# Altium PCB VRAM SIMM TC524258BJ v1.0_PCB_Altium.pcbdoc
Units mm, origin at the board's own origin, x right, y up, seen from the top; angles counter-clockwise.
Board outline 128.52 x 47.24 mm, 2 copper layers (Top Layer, Bottom Layer); 10 components, 59 nets, 328 pads, 94 vias.
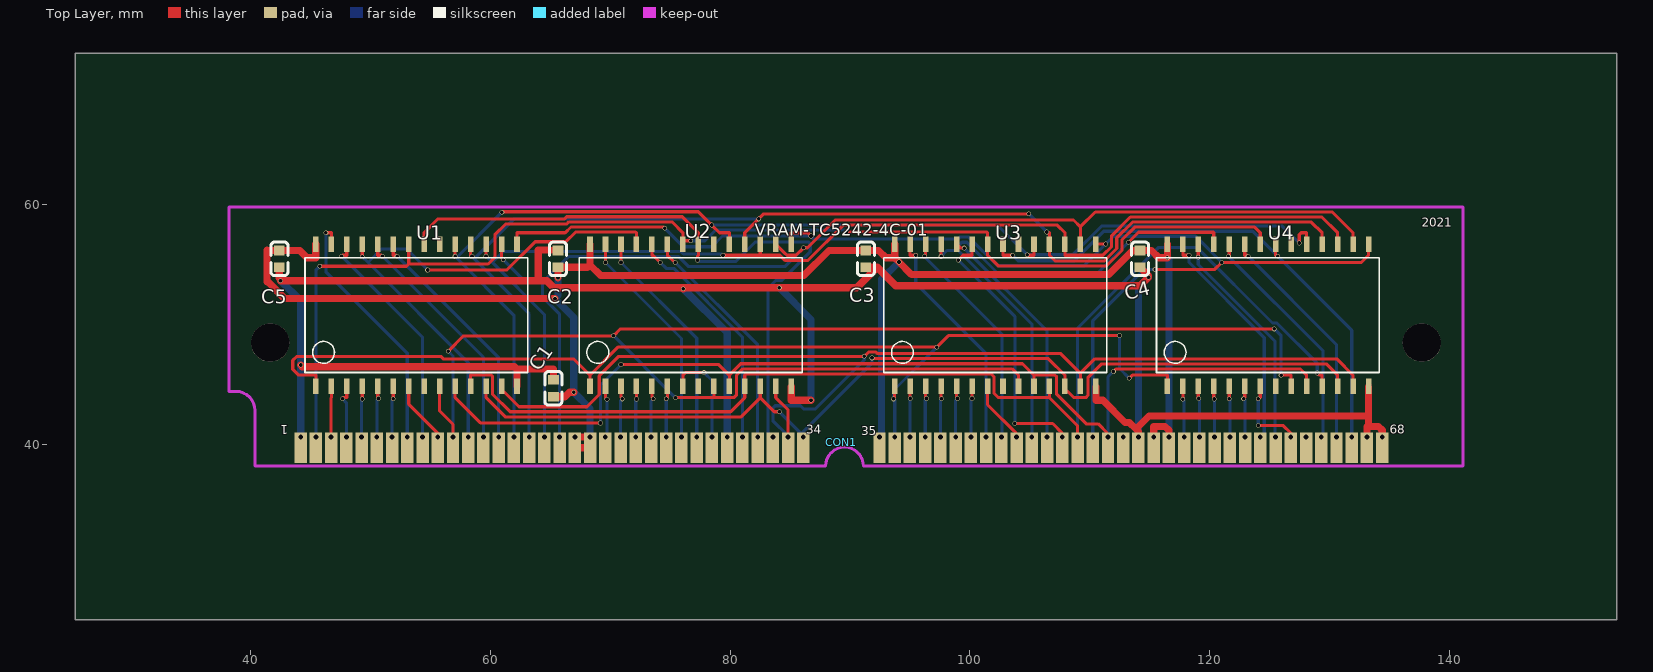
[diagram p0: Top Layer view]
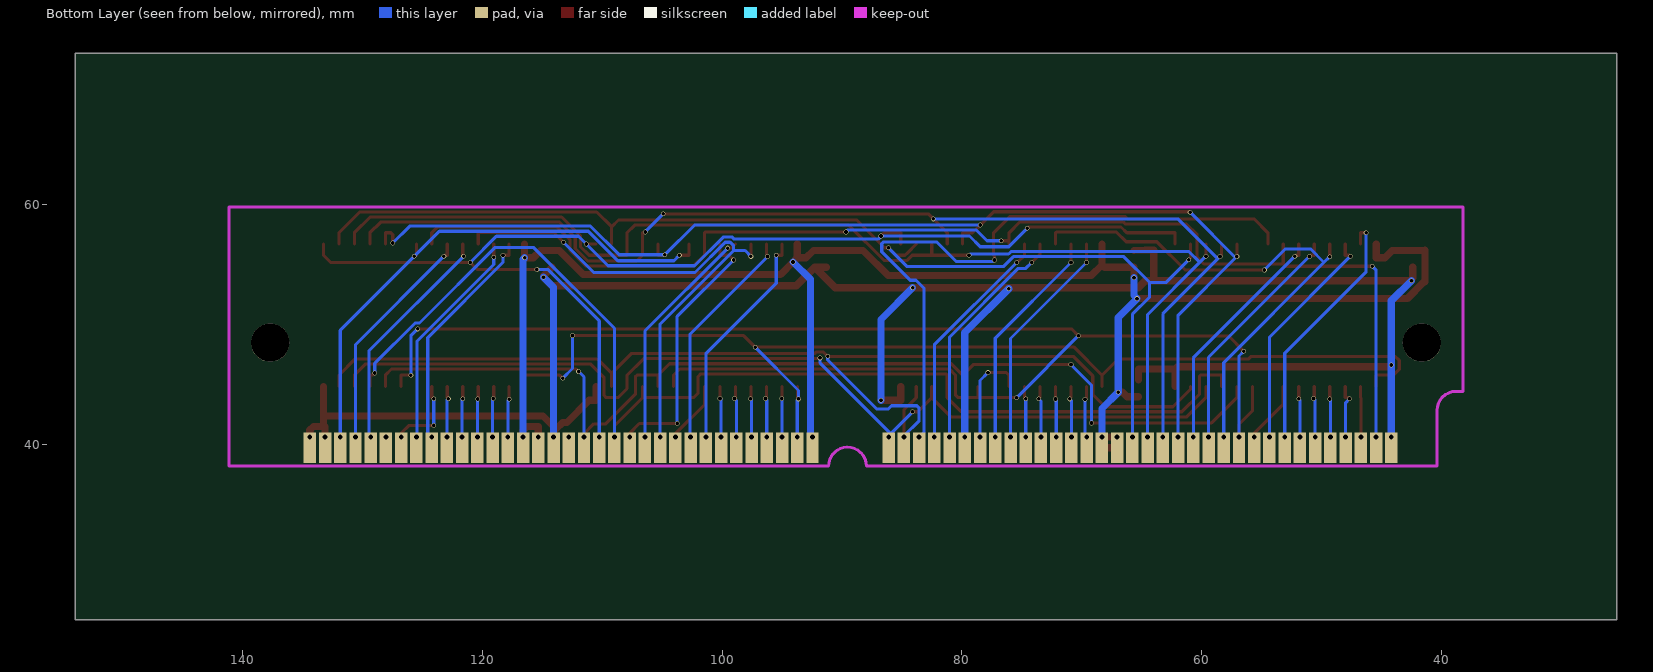
[diagram p1: Bottom Layer view, seen from below]

## Layer stack, top to bottom
Top Layer: signal copper (thickness not stored)
Dielectric: dielectric 0.32, FR-4, Dk 4.8
Bottom Layer: signal copper (thickness not stored)

## Board outline
153.924,25.4 25.4,25.4 25.4,72.644 153.924,72.644

## Components (designator, comment, footprint, x,y, rotation, side; value= is the part's Value field where it differs from the comment)
C1 "1uF" C0603 65.278,44.704 r90 top
C2 "1uF" C0603 65.659,55.499 r90 top
C3 "1uF" C0603 91.313,55.499 r270 top
C4 "1uF" C0603 114.173,55.499 r270 top
C5 "1uF" C0603 42.418,55.499 r270 top
CON1 "SIMM68" SIMM68R 43.688,38.481 r0 top
U1 "TC524258BJ" SOJ28_WIDE 53.848,50.8 r0 top
U2 "TC524258BJ" SOJ28_WIDE 76.708,50.8 r0 top
U3 "TC524258BJ" SOJ28_WIDE 102.108,50.8 r0 top
U4 "TC524258BJ" SOJ28_WIDE 124.841,50.8 r0 top

## Footprints (in the part's own frame and the unit in brackets; to place one, negate y for a bottom-side part, rotate by r counter-clockwise, add the part's x,y. Pads: shape width x height; smd on the part's side, far side on the other; paste and mask are expansions set on the pad)
C0603 [mm]
  rect 0.8x0.9 smd: 1(-0.7,0) 2(0.7,0)
  silkscreen extent -1.4,-0.7 1.4,0.72
SIMM68R [mm]
  rect 1.04x2.54 smd: 1(0.508,1.27) 2(1.778,1.27) 3(3.048,1.27) 4(4.318,1.27) 5(5.588,1.27) 6(6.858,1.27) 7(8.128,1.27) 8(9.398,1.27) 9(10.668,1.27) 10(11.938,1.27) 11(13.208,1.27) 12(14.478,1.27) 13(15.748,1.27) 14(17.018,1.27) 15(18.288,1.27) 16(19.558,1.27) 17(20.828,1.27) 18(22.098,1.27) 19(23.368,1.27) 20(24.638,1.27) 21(25.908,1.27) 22(27.178,1.27) 23(28.448,1.27) 24(29.718,1.27) 25(30.988,1.27) 26(32.258,1.27) 27(33.528,1.27) 28(34.798,1.27) 29(36.068,1.27) 30(37.338,1.27) 31(38.608,1.27) 32(39.878,1.27) 33(41.148,1.27) 34(42.418,1.27) 35(48.768,1.27) 36(50.038,1.27) 37(51.308,1.27) 38(52.578,1.27) 39(53.848,1.27) 40(55.118,1.27) 41(56.388,1.27) 42(57.658,1.27) 43(58.928,1.27) 44(60.198,1.27) 45(61.468,1.27) 46(62.738,1.27) 47(64.008,1.27) 48(65.278,1.27) 49(66.548,1.27) 50(67.818,1.27) 51(69.088,1.27) 52(70.358,1.27) 53(71.628,1.27) 54(72.898,1.27) 55(74.168,1.27) 56(75.438,1.27) 57(76.708,1.27) 58(77.978,1.27) 59(79.248,1.27) 60(80.518,1.27) 61(81.788,1.27) 62(83.058,1.27) 63(84.328,1.27) 64(85.598,1.27) 65(86.868,1.27) 66(88.138,1.27) 67(89.408,1.27) 68(90.678,1.27)
  rect 1.04x2.54 smd far side: 1(0.508,1.27) 2(1.778,1.27) 3(3.048,1.27) 4(4.318,1.27) 5(5.588,1.27) 6(6.858,1.27) 7(8.128,1.27) 8(9.398,1.27) 9(10.668,1.27) 10(11.938,1.27) 11(13.208,1.27) 12(14.478,1.27) 13(15.748,1.27) 14(17.018,1.27) 15(18.288,1.27) 16(19.558,1.27) 17(20.828,1.27) 18(22.098,1.27) 19(23.368,1.27) 20(24.638,1.27) 21(25.908,1.27) 22(27.178,1.27) 23(28.448,1.27) 24(29.718,1.27) 25(30.988,1.27) 26(32.258,1.27) 27(33.528,1.27) 28(34.798,1.27) 29(36.068,1.27) 30(37.338,1.27) 31(38.608,1.27) 32(39.878,1.27) 33(41.148,1.27) 34(42.418,1.27) 35(48.768,1.27) 36(50.038,1.27) 37(51.308,1.27) 38(52.578,1.27) 39(53.848,1.27) 40(55.118,1.27) 41(56.388,1.27) 42(57.658,1.27) 43(58.928,1.27) 44(60.198,1.27) 45(61.468,1.27) 46(62.738,1.27) 47(64.008,1.27) 48(65.278,1.27) 49(66.548,1.27) 50(67.818,1.27) 51(69.088,1.27) 52(70.358,1.27) 53(71.628,1.27) 54(72.898,1.27) 55(74.168,1.27) 56(75.438,1.27) 57(76.708,1.27) 58(77.978,1.27) 59(79.248,1.27) 60(80.518,1.27) 61(81.788,1.27) 62(83.058,1.27) 63(84.328,1.27) 64(85.598,1.27) 65(86.868,1.27) 66(88.138,1.27) 67(89.408,1.27) 68(90.678,1.27)
  round 0.5 hole 0.4: 1(0.508,2.159) 2(1.778,2.159) 3(3.048,2.159) 4(4.318,2.159) 5(5.588,2.159) 6(6.858,2.159) 7(8.128,2.159) 8(9.398,2.159) 9(10.668,2.159) 10(11.938,2.159) 11(13.208,2.159) 12(14.478,2.159) 13(15.748,2.159) 14(17.018,2.159) 15(18.288,2.159) 16(19.558,2.159) 17(20.828,2.159) 18(22.098,2.159) 19(23.368,2.159) 20(24.638,2.159) 21(25.908,2.159) 22(27.178,2.159) 23(28.448,2.159) 24(29.718,2.159) 25(30.988,2.159) 26(32.258,2.159) 27(33.528,2.159) 28(34.798,2.159) 29(36.068,2.159) 30(37.338,2.159) 31(38.608,2.159) 32(39.878,2.159) 33(41.148,2.159) 34(42.418,2.159) 35(48.768,2.159) 36(50.038,2.159) 37(51.308,2.159) 38(52.578,2.159) 39(53.848,2.159) 40(55.118,2.159) 41(56.388,2.159) 42(57.658,2.159) 43(58.928,2.159) 44(60.198,2.159) 45(61.468,2.159) 46(62.738,2.159) 47(64.008,2.159) 48(65.278,2.159) 49(66.548,2.159) 50(67.818,2.159) 51(69.088,2.159) 52(70.358,2.159) 53(71.628,2.159) 54(72.898,2.159) 55(74.168,2.159) 56(75.438,2.159) 57(76.708,2.159) 58(77.978,2.159) 59(79.248,2.159) 60(80.518,2.159) 61(81.788,2.159) 62(83.058,2.159) 63(84.328,2.159) 64(85.598,2.159) 65(86.868,2.159) 66(88.138,2.159) 67(89.408,2.159) 68(90.678,2.159)
SOJ28_WIDE [mil]
  rect 18.3x50.8 smd: 1(-330.2,-233.7) 2(-279.4,-233.7) 3(-228.6,-233.7) 4(-177.8,-233.7) 5(-127,-233.7) 6(-76.2,-233.7) 7(-25.4,-233.7) 8(25.4,-233.7) 9(76.2,-233.7) 10(127,-233.7) 11(177.8,-233.7) 12(228.6,-233.7) 13(279.4,-233.7) 14(330.2,-233.7) 15(330.2,233.7) 16(279.4,233.7) 17(228.6,233.7) 18(177.8,233.7) 19(127,233.7) 20(76.2,233.7) 21(25.4,233.7) 22(-25.4,233.7) 23(-76.2,233.7) 24(-127,233.7) 25(-177.8,233.7) 26(-228.6,233.7) 27(-279.4,233.7) 28(-330.2,233.7)
  silkscreen extent -366,-188 366,188

## Free pads (board coordinates)
  round 3.18 hole 3.18 unplated: ""(41.656,48.514) ""(137.668,48.514)

## Via types
v1: diameter 0.4, hole 0.31, Top Layer to Bottom Layer, 94 vias

## Nets (pads, with @x,y where several pads share a name; then routed paths per layer and width w, separated by ;. In a path a pad name is that pad's centre, name@x,y a point inside that pad or via, vN(x,y) a via of type N, cw(c..) or ccw(c..) an arc to the next point about the centre after c; other vN are vias at no path point)
/CAS_A: CON1.32 U1.21 U2.21 | length 57.2
  Top Layer w0.26: U1.21 54.493,57.673 55.651,58.831 66.208,58.831 66.383,59.007 76.02,59.007 77.353,57.673 U2.21 77.353,56.266 77.353,55.799 77.282,55.725 v1(77.282,55.41) ; CON1.32@83.566,39.751 CON1.32@83.566,40.64
  Bottom Layer w0.26: v1(77.282,55.41) 77.414,55.278 80.48,55.278 82.118,56.916 86.52,56.916 86.683,56.756 86.683,56.091 84.313,53.718 83.83,53.718 83.144,53.033 83.144,41.062 83.566,40.64 CON1.32@83.566,39.751
/CAS_B: CON1.66 U3.21 U4.21 | length 46.5
  Top Layer w0.26: U3.21 102.753,55.799 v1(103.556,55.799) ; U4.21 125.486,56.266 125.486,55.799 125.565,55.799 v1(125.654,55.712) ; CON1.66@131.826,39.751 CON1.66@131.826,40.64
  Bottom Layer w0.26: v1(103.556,55.799) 104.008,55.344 108.687,55.344 111.145,57.803 123.561,57.803 v1(125.654,55.712) 131.826,49.538 131.826,40.64 CON1.66@131.826,39.751
/DT/OE_1: CON1.5 U1.4 | length 6
  Top Layer w0.26: CON1.5@49.276,39.751 CON1.5@49.276,40.64 ; v1(49.332,43.81) U1.4
  Bottom Layer w0.26: CON1.5@49.276,39.751 49.276,40.64 49.276,43.754 v1(49.332,43.81)
/DT/OE_2: CON1.23 U2.4 | length 6
  Top Layer w0.26: CON1.23@72.136,39.751 CON1.23@72.136,40.64 ; v1(72.192,43.812) U2.4
  Bottom Layer w0.26: CON1.23@72.136,39.751 72.136,40.64 72.136,43.757 v1(72.192,43.812)
/DT/OE_3: CON1.39 U3.4 | length 6.1
  Top Layer w0.26: CON1.39@97.536,39.751 CON1.39@97.536,40.64 ; U3.4 97.592,43.884 v1(97.633,43.84)
  Bottom Layer w0.26: CON1.39@97.536,39.751 97.536,40.64 97.536,43.744 v1(97.633,43.84)
/DT/OE_4: CON1.57 U4.4 | length 6
  Top Layer w0.26: U4.4 120.325,43.863 v1(120.363,43.823) ; CON1.57@120.396,39.751 CON1.57@120.396,40.64
  Bottom Layer w0.26: v1(120.363,43.823) 120.396,43.792 120.396,40.64 CON1.57@120.396,39.751
/RAS: CON1.11 U1.9 U2.9 U3.9 U4.9 | length 129.3
  Top Layer w0.26: U1.9 55.783,42.814 56.896,41.702 56.896,40.64 CON1.11@56.896,39.751 ; v1(56.495,47.803) 57.777,49.083 v1(70.284,49.083) 70.863,49.662 v1(125.374,49.662) ; v1(75.441,43.927) 78.643,43.927 ; U2.9 78.643,43.927 ; U3.9 104.043,45.801 103.513,46.332 81.064,46.332 80.548,45.819 80.548,44.158 80.317,43.927 78.643,43.927 ; v1(125.941,45.801) 126.776,45.801 U4.9
  Bottom Layer w0.26: v1(56.495,47.803) 56.896,47.401 56.896,40.64 CON1.11@56.896,39.751 ; v1(70.284,49.083) v1(75.441,43.927) ; v1(125.374,49.662) 125.941,49.096 v1(125.941,45.801)
/SE_A: CON1.12 U1.25 U2.25 | length 47.4
  Top Layer w0.26: v1(49.332,55.677) U1.25 ; v1(54.78,54.567) 61.392,54.567 63.754,56.929 66.309,56.929 67.12,57.739 72.126,57.739 72.192,57.673 U2.25 ; CON1.12@58.166,39.751 CON1.12@58.166,40.64
  Bottom Layer w0.26: v1(49.332,55.677) 49.807,55.202 ; v1(54.78,54.567) 53.017,56.332 50.935,56.332 49.807,55.202 ; CON1.12@58.166,39.751 58.166,40.64 58.166,46.843 49.807,55.202
/SE_B: CON1.45 U3.25 U4.25 | length 47.7
  Top Layer w0.26: v1(97.592,55.707) U3.25 ; CON1.45@105.156,39.751 CON1.45@105.156,40.64 ; v1(113.215,56.888) 114.046,57.719 120.279,57.719 120.325,57.673 U4.25
  Bottom Layer w0.26: v1(97.592,55.707) 98.074,56.19 99.035,56.19 ; CON1.45@105.156,39.751 105.156,40.64 105.156,50.068 99.035,56.19 ; v1(113.215,56.888) 110.693,54.364 102.253,54.364 99.733,56.886 99.324,56.886 99.035,56.596 99.035,56.19
/WB/WE_1: CON1.10 U1.7 | length 7
  Top Layer w0.26: U1.7 53.203,43.386 55.626,40.963 55.626,40.64 CON1.10@55.626,39.751
  Bottom Layer w0.26: CON1.10@55.626,39.751 CON1.10@55.626,40.64
/WB/WE_2: CON1.28 U2.7 | length 10.2
  Top Layer w0.26: U2.7 76.063,45.801 76.276,46.015 v1(77.831,46.015) ; CON1.28@78.486,39.751 CON1.28@78.486,40.64
  Bottom Layer w0.26: v1(77.831,46.015) 78.486,45.359 78.486,40.64 CON1.28@78.486,39.751
/WB/WE_3: CON1.44 U3.7 | length 7
  Top Layer w0.26: U3.7 101.463,43.348 103.886,40.924 103.886,40.64 CON1.44@103.886,39.751
  Bottom Layer w0.26: CON1.44@103.886,39.751 CON1.44@103.886,40.64
/WB/WE_4: CON1.62 U4.7 | length 8.5
  Top Layer w0.26: v1(124.036,41.598) 126.124,41.598 126.746,40.978 126.746,40.64 CON1.62@126.746,39.751 ; v1(124.036,43.838) 124.125,43.927 124.196,43.927 U4.7
  Bottom Layer w0.26: v1(124.036,41.598) v1(124.036,43.838) ; CON1.62@126.746,39.751 CON1.62@126.746,40.64
A0: CON1.15 U1.19 U2.19 U3.19 U4.19 | length 101.3
  Top Layer w0.26: v1(57.074,55.702) U1.19 ; v1(60.973,59.378) 61.026,59.431 77.356,59.431 v1(78.473,58.313) 79.113,57.673 79.934,57.673 U2.19 ; CON1.15@61.976,39.751 CON1.15@61.976,40.64 ; v1(104.765,55.837) 104.803,55.799 105.334,55.799 U3.19 ; v1(127.452,56.825) 127.452,57.511 127.615,57.673 128.067,57.673 U4.19
  Bottom Layer w0.26: v1(57.074,55.702) v1@57.186,55.59 ; v1(60.973,59.378) v1@57.186,55.59 ; CON1.15@61.976,39.751 61.976,40.64 61.976,50.8 v1@57.186,55.59 ; v1(78.473,58.313) 102.288,58.313 v1(104.765,55.837) 108.575,55.837 110.965,58.227 126.047,58.227 v1(127.452,56.825)
A1: CON1.16 U1.18 U2.18 U3.18 U4.18 | length 100.6
  Top Layer w0.26: U1.18 58.364,55.799 v1(58.476,55.687) ; CON1.16@63.246,39.751 CON1.16@63.246,40.64 ; U2.18 81.224,57.673 v1(82.385,58.834) 82.804,59.253 v1(104.897,59.253) ; v1(106.403,57.747) 106.477,57.673 106.624,57.673 U3.18 106.624,56.327 106.624,55.799 107.089,55.334 111.209,55.334 112.235,56.36 112.235,57.252 113.548,58.565 128.466,58.565 129.357,57.673 U4.18
  Bottom Layer w0.26: v1(58.476,55.687) 58.664,55.499 ; CON1.16@63.246,39.751 63.246,40.64 63.246,50.917 58.664,55.499 ; v1(82.385,58.834) 61.999,58.834 58.664,55.499 ; v1(104.897,59.253) v1(106.403,57.747)
A2: CON1.17 U1.17 U2.17 U3.17 U4.17 | length 98.7
  Top Layer w0.26: v1(59.654,55.72) U1.17 ; CON1.17@64.516,39.751 CON1.17@64.516,40.64 ; v1(79.408,55.799) 82.514,55.799 ; U2.17 82.514,55.799 ; U4.17 130.647,57.673 129.334,58.986 113.373,58.986 111.808,57.422 111.808,56.53 111.074,55.799 107.914,55.799 U3.17 107.914,57.203 107.914,57.673 107.274,58.313 89.428,58.313 86.49,55.375 84.567,55.375 84.143,55.799 82.514,55.799
  Bottom Layer w0.26: v1(59.654,55.72) 60.175,55.202 ; CON1.17@64.516,39.751 64.516,40.64 64.516,50.858 60.175,55.202 ; v1(79.408,55.799) 79.306,55.903 76.101,55.903 75.888,56.114 61.087,56.114 60.175,55.202
A3: CON1.18 U1.16 U2.16 U3.16 U4.16 | length 97.9
  Top Layer w0.26: U1.16 60.945,55.565 v1(61.09,55.42) ; CON1.18@65.786,39.751 CON1.18@65.786,40.64 ; U2.16 84.569,55.971 84.569,55.969 84.742,55.799 85.499,55.799 v1(86.126,56.424) 86.457,56.424 88.77,58.737 108.631,58.737 109.205,58.163 ; U3.16 109.205,57.673 109.205,58.163 ; U4.16 131.938,57.673 130.2,59.411 110.452,59.411 109.205,58.163
  Bottom Layer w0.26: v1(61.09,55.42) 62.967,53.543 64.356,53.543 ; CON1.18@65.786,39.751 65.786,40.64 65.786,50.871 64.356,52.301 64.356,53.543 ; v1(86.126,56.424) 84.557,54.854 76.548,54.854 75.712,55.689 66.502,55.689 64.356,53.543
A4: CON1.33 U1.13 U2.13 U3.13 U4.13 | length 97.6
  Top Layer w0.26: U1.13 60.945,44.633 62.405,43.17 68.067,43.17 69.086,44.191 69.086,45.74 70.716,47.371 v1(91.186,47.371) 91.554,47.739 92.136,47.739 92.276,47.602 107.561,47.602 109.205,45.959 ; U2.13 83.805,43.927 84.836,42.896 84.836,40.64 CON1.33@84.836,39.751 ; U3.13 109.205,45.801 109.205,45.959 ; U4.13 131.938,45.801 130.574,47.165 110.411,47.165 109.205,45.959
  Bottom Layer w0.26: CON1.33@84.836,39.751 84.836,40.64 84.836,40.731 83.566,42.001 83.566,43.048 83.767,43.249 85.87,43.249 86.134,42.987 87.109,42.987 91.186,47.064 v1(91.186,47.371)
A5: CON1.34 U1.12 U2.12 U3.12 U4.12 | length 85.8
  Top Layer w0.26: U1.12 59.654,43.927 61.255,42.324 80.914,42.324 82.514,43.927 ; U2.12 82.514,44.394 82.514,43.927 ; v1(84.11,42.756) 83.685,42.756 82.514,43.927 ; CON1.34@86.106,39.751 CON1.34@86.106,40.64 ; v1(91.821,47.244) 91.887,47.178 106.538,47.178 107.914,45.801 107.914,45.227 U3.12 107.914,44.679 108.666,43.927 109.654,43.927 109.83,44.102 109.83,45.585 110.988,46.744 129.705,46.744 130.647,45.801 U4.12
  Bottom Layer w0.26: v1(84.11,42.756) CON1.34@85.941,40.924 ; CON1.34@86.106,39.751 86.106,40.64 86.106,40.759 CON1.34@85.941,40.924 ; v1(91.821,47.244) 91.821,46.805 CON1.34@85.941,40.925
A6: CON1.48 U1.11 U2.11 U3.11 U4.11 | length 100.4
  Top Layer w0.26: U1.11 58.364,45.801 60.104,45.801 60.18,45.725 60.18,44.232 61.664,42.748 80.046,42.748 81.224,43.927 U2.11 81.224,45.801 81.333,45.91 101.778,45.91 101.989,45.697 101.989,44.315 102.377,43.927 106.624,43.927 ; U3.11 106.624,43.927 ; CON1.48@108.966,39.751 108.966,40.64 108.966,41.585 106.624,43.927 ; v1(128.951,45.984) 129.134,45.801 129.357,45.801 U4.11
  Bottom Layer w0.26: CON1.48@108.966,39.751 108.966,40.64 108.966,49.705 115.722,56.462 118.915,56.462 125.222,50.155 125.578,50.155 128.951,46.782 v1(128.951,45.984)
A7: CON1.49 U1.15 U2.15 U3.15 U4.15 | length 105.2
  Top Layer w0.26: U1.15 62.235,57.673 66.243,57.673 66.733,58.161 74.437,58.161 v1(74.544,58.057) ; U2.15 85.095,57.673 86.462,57.673 v1(86.736,57.399) ; CON1.49@110.236,39.751 CON1.49@110.236,40.64 ; U3.15 v1(111.316,56.736) ; v1(115.435,54.62) 120.416,54.62 v1(120.993,55.197) 132.629,55.197 133.228,55.799 U4.15
  Bottom Layer w0.26: v1(74.544,58.057) 76.086,56.512 78.476,56.512 79.362,57.399 v1(86.736,57.399) 86.985,57.147 98.989,57.147 99.149,57.307 99.908,57.307 102.296,54.92 109.502,54.92 v1(111.316,56.736) 111.961,57.381 118.811,57.381 v1(120.993,55.197) ; CON1.49@110.236,39.751 110.236,40.64 110.236,50.333 114.524,54.62 v1(115.435,54.62)
A8: CON1.50 U1.10 U2.10 U3.10 U4.10 | length 91.1
  Top Layer w0.26: U1.10 57.074,43.927 59.179,41.821 v1(69.195,41.821) ; v1(70.907,46.683) 79.052,46.683 79.934,45.801 ; U2.10 79.934,45.801 ; U3.10 105.334,45.801 ; CON1.50@111.506,39.751 111.506,40.64 111.506,40.917 110.68,41.742 109.692,41.742 107.224,44.214 107.224,45.667 107.086,45.801 105.334,45.801 ; v1(111.953,46.109) 112.164,46.319 127.549,46.319 128.067,45.801 U4.10 ; 79.934,45.801 80.889,46.756 104.379,46.756 105.334,45.801
  Bottom Layer w0.26: v1(69.195,41.821) 69.195,44.971 v1(70.907,46.683) ; CON1.50@111.506,39.751 111.506,40.64 111.506,45.662 v1(111.953,46.109)
DSF: CON1.2 U1.22 U2.22 U3.22 U4.22 | length 105.9
  Top Layer w0.26: CON1.2@45.466,39.751 CON1.2@45.466,40.64 ; v1(45.794,54.879) 53.015,54.879 53.203,55.067 ; U1.22 53.203,55.799 53.203,55.067 ; U2.22 U2.22@76.063,57.008 ; v1(76.711,57.008) U2.22@76.063,57.008 ; v1(89.665,57.739) 101.397,57.739 101.463,57.673 U3.22 101.463,56.266 101.463,55.799 102.349,54.912 111.384,54.912 112.669,56.197 112.669,57.089 113.723,58.141 123.728,58.141 124.196,57.673 U4.22 ; 53.203,55.067 59.822,55.067 60.389,55.634 60.389,57.506 61.293,58.41 66.383,58.41 66.558,58.585 75.151,58.585 76.063,57.673 U2.22@76.063,57.008
  Bottom Layer w0.26: CON1.2@45.466,39.751 45.466,40.64 45.466,54.552 v1(45.794,54.879) ; v1(76.711,57.008) 77.902,57.008 78.783,57.892 89.512,57.892 v1(89.665,57.739)
GND: C1.1 C2.1 C3.1 C4.1 C5.1 CON1.19 CON1.20 CON1.35 CON1.53 CON1.54 U1.28 U2.28 U3.28 U4.28 | length 151.6
  Top Layer w0.6: 41.402,53.594 41.402,56.21 ; 41.468,53.584 42.87,52.182 v1(65.397,52.182) ; 41.468,56.2 C5.1 44.12,56.2 44.729,55.59 45.461,55.59 45.461,56.162 U1.28 ; C1.1 66.228,44.003 66.604,44.379 v1(66.97,44.379) ; v1(65.659,53.927) C2.1 66.609,54.798 68.123,54.798 68.321,54.996 ; CON1.19@67.056,39.751 68.326,39.751 68.326,40.64 CON1.19@67.056,40.64 ; U2.28 68.321,55.59 68.321,54.996 ; CON1.35@92.456,39.751 CON1.35@92.456,40.64 ; U3.28 93.721,55.59 ; CON1.53@115.316,39.751 115.316,40.64 115.316,41.521 116.268,41.521 116.586,41.204 116.586,40.64 CON1.54@116.586,39.751 ; U4.28 116.454,56.162 v1(116.454,55.59) 115.733,55.59 115.123,56.2 C4.1 113.563,56.2 111.567,54.201 95.11,54.201 v1(94.074,55.237) 93.721,55.59 ; 68.321,54.996 69.215,54.102 86.147,54.102 88.245,56.2 C3.1 92.38,56.2 92.989,55.59 93.721,55.59
  Bottom Layer w0.6: v1(65.659,53.927) 65.659,52.446 v1(65.397,52.182) 66.97,50.609 v1(66.97,44.379) 68.326,43.023 68.326,40.64 CON1.20@68.326,39.751 ; CON1.19@67.056,39.751 CON1.19@67.056,40.64 ; CON1.35@92.456,39.751 92.456,40.64 92.631,40.815 92.631,53.797 v1(94.074,55.237) ; CON1.53@115.316,39.751 CON1.53@115.316,40.64 ; v1(116.454,55.59) 116.586,55.458 116.586,40.64 CON1.54@116.586,39.751
I/O1_A: CON1.6 U1.5 | length 6.1
  Top Layer w0.26: CON1.6@50.546,39.751 CON1.6@50.546,40.64 ; U1.5 50.622,43.927 v1(50.693,43.856)
  Bottom Layer w0.26: CON1.6@50.546,39.751 50.546,40.64 50.546,43.708 v1(50.693,43.856)
I/O1_B: CON1.40 U3.5 | length 6.1
  Top Layer w0.26: CON1.40@98.806,39.751 CON1.40@98.806,40.64 ; U3.5 98.882,43.927 v1(98.956,43.853)
  Bottom Layer w0.26: CON1.40@98.806,39.751 98.806,40.64 98.806,43.703 v1(98.956,43.853)
I/O2_A: CON1.7 U1.6 | length 6
  Top Layer w0.26: CON1.7@51.816,39.751 CON1.7@51.816,40.64 ; v1(51.913,43.84) U1.6
  Bottom Layer w0.26: CON1.7@51.816,39.751 51.816,40.64 51.816,43.744 v1(51.913,43.84)
I/O2_B: CON1.41 U3.6 | length 6
  Top Layer w0.26: CON1.41@100.076,39.751 CON1.41@100.076,40.64 ; v1(100.173,43.853) U3.6
  Bottom Layer w0.26: CON1.41@100.076,39.751 100.076,40.64 100.076,43.757 v1(100.173,43.853)
I/O3_A: CON1.14 U1.23 | length 21.7
  Top Layer w0.26: U1.23 51.913,55.799 52.151,55.799 v1(52.24,55.712) ; CON1.14@60.706,39.751 CON1.14@60.706,40.64
  Bottom Layer w0.26: v1(52.24,55.712) 60.706,47.244 60.706,40.64 CON1.14@60.706,39.751
I/O3_B: CON1.47 U3.23 | length 24.2
  Top Layer w0.26: v1(99.03,55.41) 99.416,55.799 100.173,55.799 U3.23 ; v1(103.736,41.77) 106.891,41.77 107.696,40.963 107.696,40.64 CON1.47@107.696,39.751
  Bottom Layer w0.26: v1(99.03,55.41) 103.736,50.703 v1(103.736,41.77) ; CON1.47@107.696,39.751 CON1.47@107.696,40.64
I/O4_A: CON1.13 U1.24 | length 21.7
  Top Layer w0.26: U1.24 50.622,55.799 50.927,55.799 v1(51.024,55.702) ; CON1.13@59.436,39.751 CON1.13@59.436,40.64
  Bottom Layer w0.26: v1(51.024,55.702) 59.436,47.29 59.436,40.64 CON1.13@59.436,39.751
I/O4_B: CON1.46 U3.24 | length 21.2
  Top Layer w0.26: U3.24 99.225,56.393 v1(99.527,56.393) ; CON1.46@106.426,39.751 CON1.46@106.426,40.64
  Bottom Layer w0.26: v1(99.527,56.393) 106.426,49.494 106.426,40.64 CON1.46@106.426,39.751
I/O5_A: CON1.24 U2.5 | length 6.1
  Top Layer w0.26: CON1.24@73.406,39.751 CON1.24@73.406,40.64 ; U2.5 73.482,43.927 73.5,43.927 v1(73.594,43.833)
  Bottom Layer w0.26: CON1.24@73.406,39.751 73.406,40.64 73.406,43.645 v1(73.594,43.833)
I/O5_B: CON1.58 U4.5 | length 6
  Top Layer w0.26: v1(121.615,43.83) U4.5 ; CON1.58@121.666,39.751 CON1.58@121.666,40.64
  Bottom Layer w0.26: v1(121.615,43.83) 121.666,43.779 121.666,40.64 CON1.58@121.666,39.751
I/O6_A: CON1.25 U2.6 | length 6
  Top Layer w0.26: CON1.25@74.676,39.751 CON1.25@74.676,40.64 ; v1(74.679,43.833) 74.773,43.927 U2.6
  Bottom Layer w0.26: CON1.25@74.676,39.751 74.676,40.64 74.676,43.83 v1(74.679,43.833)
I/O6_B: CON1.59 U4.6 | length 6.1
  Top Layer w0.26: v1(122.814,43.835) 122.906,43.927 U4.6 ; CON1.59@122.936,39.751 CON1.59@122.936,40.64
  Bottom Layer w0.26: v1(122.814,43.835) 122.936,43.713 122.936,40.64 CON1.59@122.936,39.751
I/O7_A: CON1.31 U2.23 | length 21
  Top Layer w0.26: U2.23 74.773,55.799 75.374,55.197 v1(75.433,55.197) ; CON1.31@82.296,39.751 CON1.31@82.296,40.64
  Bottom Layer w0.26: v1(75.433,55.197) 82.296,48.334 82.296,40.64 CON1.31@82.296,39.751
I/O7_B: CON1.65 U4.23 | length 21.4
  Top Layer w0.26: U4.23 122.906,55.799 ; v1@123.101,55.712 123.015,55.799 122.906,55.799 ; v1(123.187,55.71) 123.099,55.799 122.906,55.799 ; CON1.65@130.556,39.751 CON1.65@130.556,40.64
  Bottom Layer w0.26: v1(123.187,55.71) 130.556,48.341 130.556,40.64 CON1.65@130.556,39.751
I/O8_A: CON1.30 U2.24 | length 21.4
  Top Layer w0.26: U2.24 73.482,55.799 73.571,55.799 v1(74.173,55.197) ; CON1.30@81.026,39.751 CON1.30@81.026,40.64
  Bottom Layer w0.26: v1(74.173,55.197) 74.666,54.704 75.301,54.704 81.026,48.979 81.026,40.64 CON1.30@81.026,39.751
I/O8_B: CON1.64 U4.24 | length 21.2
  Top Layer w0.26: v1(121.542,55.725) 121.615,55.799 U4.24 ; CON1.64@129.286,39.751 CON1.64@129.286,40.64
  Bottom Layer w0.26: v1(121.542,55.725) 129.443,47.823 129.443,40.797 129.286,40.64 CON1.64@129.286,39.751
S$68: 
SC: CON1.36 U1.1 U2.1 U3.1 U4.1 | length 95.8
  Top Layer w0.26: U1.1 45.461,45.801 44.033,45.801 43.538,46.297 43.538,47.036 43.845,47.343 55.921,47.343 56.124,47.142 66.98,47.142 68.321,45.801 ; U2.1 68.321,45.801 ; v1(93.619,43.825) 93.721,43.927 93.721,44.394 U3.1 ; CON1.36@93.726,39.751 CON1.36@93.726,40.64 ; v1(112.464,49.101) 98.199,49.101 v1(97.229,48.128) 97.193,48.163 70.683,48.163 68.321,45.801 ; v1(113.279,45.54) 113.541,45.801 116.454,45.801 U4.1
  Bottom Layer w0.26: CON1.36@93.726,39.751 93.726,40.64 93.726,43.716 v1(93.619,43.825) 93.619,44.519 v1(97.229,48.128) ; v1(112.464,49.101) 112.464,46.355 v1(113.279,45.54)
SI/O1_A: CON1.3 U1.2 | length 6
  Top Layer w0.26: CON1.3@46.736,39.751 46.736,40.64 46.736,43.912 46.751,43.927 U1.2
  Bottom Layer w0.26: CON1.3@46.736,39.751 CON1.3@46.736,40.64
SI/O1_B: CON1.37 U3.2 | length 6
  Top Layer w0.26: CON1.37@94.996,39.751 CON1.37@94.996,40.64 ; v1(95.011,43.856) U3.2
  Bottom Layer w0.26: CON1.37@94.996,39.751 94.996,40.64 94.996,43.84 v1(95.011,43.856)
SI/O2_A: CON1.4 U1.3 | length 6.4
  Top Layer w0.26: v1(47.678,43.833) 47.772,43.927 48.042,43.927 U1.3 ; CON1.4@48.006,39.751 CON1.4@48.006,40.64
  Bottom Layer w0.26: v1(47.678,43.833) 48.006,43.505 48.006,40.64 CON1.4@48.006,39.751
SI/O2_B: CON1.38 U3.3 | length 6.1
  Top Layer w0.26: CON1.38@96.266,39.751 CON1.38@96.266,40.64 ; U3.3 96.302,43.927 v1(96.375,43.853)
  Bottom Layer w0.26: CON1.38@96.266,39.751 96.266,40.64 96.266,43.744 v1(96.375,43.853)
SI/O3_A: CON1.9 U1.26 | length 21.1
  Top Layer w0.26: v1(47.607,55.712) 47.694,55.799 48.042,55.799 U1.26 ; CON1.9@54.356,39.751 CON1.9@54.356,40.64
  Bottom Layer w0.26: v1(47.607,55.712) 54.356,48.964 54.356,40.64 CON1.9@54.356,39.751
SI/O3_B: CON1.43 U3.26 | length 20.6
  Top Layer w0.26: v1(96.2,55.697) 96.302,55.799 U3.26 ; CON1.43@102.616,39.751 CON1.43@102.616,40.64
  Bottom Layer w0.26: v1(96.2,55.697) 102.659,49.238 102.659,40.683 102.616,40.64 CON1.43@102.616,39.751
SI/O4_A: CON1.8 U1.27 | length 23
  Top Layer w0.26: v1(46.299,57.673) 46.751,57.673 U1.27 ; CON1.8@53.086,39.751 CON1.8@53.086,40.64
  Bottom Layer w0.26: v1(46.299,57.673) 46.299,54.427 53.086,47.64 53.086,40.64 CON1.8@53.086,39.751
SI/O4_B: CON1.42 U3.27 | length 20.8
  Top Layer w0.26: U3.27 95.011,55.799 v1(95.476,55.799) ; CON1.42@101.346,39.751 CON1.42@101.346,40.64
  Bottom Layer w0.26: v1(95.476,55.799) 95.476,53.459 101.346,47.589 101.346,40.64 CON1.42@101.346,39.751
SI/O5_A: CON1.21 U2.2 | length 6.1
  Top Layer w0.26: CON1.21@69.596,39.751 CON1.21@69.596,40.64 ; U2.2 69.611,43.927 v1(69.738,43.8)
  Bottom Layer w0.26: CON1.21@69.596,39.751 69.596,40.64 69.738,40.782 v1(69.738,43.8)
SI/O5_B: CON1.55 U4.2 | length 6
  Top Layer w0.26: v1(117.744,43.79) U4.2 ; CON1.55@117.856,39.751 CON1.55@117.856,40.64
  Bottom Layer w0.26: v1(117.744,43.79) 117.856,43.678 117.856,40.64 CON1.55@117.856,39.751
SI/O6_A: CON1.22 U2.3 | length 6.1
  Top Layer w0.26: CON1.22@70.866,39.751 CON1.22@70.866,40.64 ; U2.3 70.902,43.927 v1(71.003,43.825)
  Bottom Layer w0.26: CON1.22@70.866,39.751 70.866,40.64 70.866,43.688 v1(71.003,43.825)
SI/O6_B: CON1.56 U4.3 | length 6
  Top Layer w0.26: U4.3 119.035,43.891 v1(119.078,43.851) ; CON1.56@119.126,39.751 CON1.56@119.126,40.64
  Bottom Layer w0.26: v1(119.078,43.851) 119.126,43.8 119.126,40.64 CON1.56@119.126,39.751
SI/O7_A: CON1.27 U2.26 | length 20.5
  Top Layer w0.26: v1(70.902,55.197) U2.26 ; CON1.27@77.216,39.751 CON1.27@77.216,40.64
  Bottom Layer w0.26: v1(70.902,55.197) 77.216,48.882 77.216,40.64 CON1.27@77.216,39.751
SI/O7_B: CON1.61 U4.26 | length 20.5
  Top Layer w0.26: v1(119.035,55.626) U4.26 ; CON1.61@125.476,39.751 CON1.61@125.476,40.64
  Bottom Layer w0.26: v1(119.035,55.626) 119.035,55.027 125.425,48.636 125.425,40.691 125.476,40.64 CON1.61@125.476,39.751
SI/O8_A: CON1.26 U2.27 | length 20.5
  Top Layer w0.26: v1(69.611,55.197) U2.27 ; CON1.26@75.946,39.751 CON1.26@75.946,40.64
  Bottom Layer w0.26: v1(69.611,55.197) 75.946,48.862 75.946,40.64 CON1.26@75.946,39.751
SI/O8_B: CON1.60 U4.27 | length 21.1
  Top Layer w0.26: U4.27 117.744,55.799 v1(118.26,55.799) ; CON1.60@124.206,39.751 CON1.60@124.206,40.64
  Bottom Layer w0.26: v1(118.26,55.799) 118.26,55.204 124.529,48.936 124.529,40.963 124.206,40.64 CON1.60@124.206,39.751
VCC: C1.2 C2.2 C3.2 C4.2 C5.2 CON1.1 CON1.29 CON1.52 CON1.67 CON1.68 U1.14 U2.14 U3.14 U4.14 | length 201
  Top Layer w0.6: C5.2 42.418,53.899 42.517,53.8 v1(42.517,53.678) 64.709,53.678 65.298,53.089 v1@76.101,53.089 ; CON1.1@44.196,39.751 CON1.1@44.196,40.64 ; v1(44.196,46.652) 44.336,46.51 62.029,46.51 62.235,46.304 ; U1.14 62.235,46.01 62.235,46.304 ; 64.008,53.721 64.008,56.243 64.709,56.243 C2.2 ; C1.2 65.278,46.304 62.235,46.304 ; v1(76.101,53.012) v1@76.101,53.089 ; CON1.29@79.756,39.751 CON1.29@79.756,40.64 ; U2.14 85.095,43.718 v1(86.749,43.718) ; C3.2 92.263,54.798 ; U3.14 110.495,43.718 111.079,43.718 112.933,41.867 113.287,41.867 113.84,41.313 ; CON1.52@114.046,39.751 114.046,40.64 114.046,41.107 113.84,41.313 ; C4.2 114.877,54.094 v1(114.877,53.96) 114.173,53.254 93.81,53.254 92.263,54.798 ; CON1.67@133.096,39.751 133.096,40.64 133.096,41.521 133.228,41.521 ; U4.14 133.228,44.29 133.228,43.718 133.228,42.39 ; CON1.68@134.366,39.751 134.366,40.64 134.366,41.204 134.048,41.521 133.228,41.521 ; v1@76.101,53.089 v1(84.107,53.089) 90.554,53.089 92.263,54.798 ; 113.84,41.313 114.915,42.39 133.228,42.39 ; 133.228,41.521 133.228,42.39
  Bottom Layer w0.6: v1(42.517,53.678) 44.196,51.999 v1(44.196,46.652) 44.196,40.64 CON1.1@44.196,39.751 ; v1(76.101,53.012) 79.756,49.357 79.756,40.64 CON1.29@79.756,39.751 ; v1(84.107,53.089) 86.749,50.447 v1(86.749,43.718) ; CON1.52@114.046,39.751 114.046,40.64 114.046,53.127 v1(114.877,53.96) ; CON1.67@133.096,39.751 CON1.67@133.096,40.64 ; CON1.68@134.366,39.751 CON1.68@134.366,40.64
pads on no net: CON1.51 CON1.63 U1.8 U1.20 U2.8 U2.20 U3.8 U3.20 U4.8 U4.20

## Silkscreen, mask and mechanical layers (free items; w line width, h text height)
Top Overlay:
  text "2021" at 137.668,58.176 h0.74
  text "VRAM-TC5242-4C-01" at 82.042,57.412 h1
  text "1" at 43.18,41.646 h0.74 r180
  text "34" at 86.36,40.904 h0.74
  text "68" at 135.001,40.904 h0.74
  text "35" at 90.932,40.777 h0.74
Document:
  lines w0.003: 89.637,48.997 89.687,49.047